# Altium PCB Pcb.PcbDoc (part 2 of 2)
Units mm, origin at the board's own origin, x right, y up, seen from the top; angles counter-clockwise.
Board outline 99.85 x 75.77 mm, 2 copper layers (Top Layer, Bottom Layer); 30 components, 145 nets, 485 pads, 129 vias.
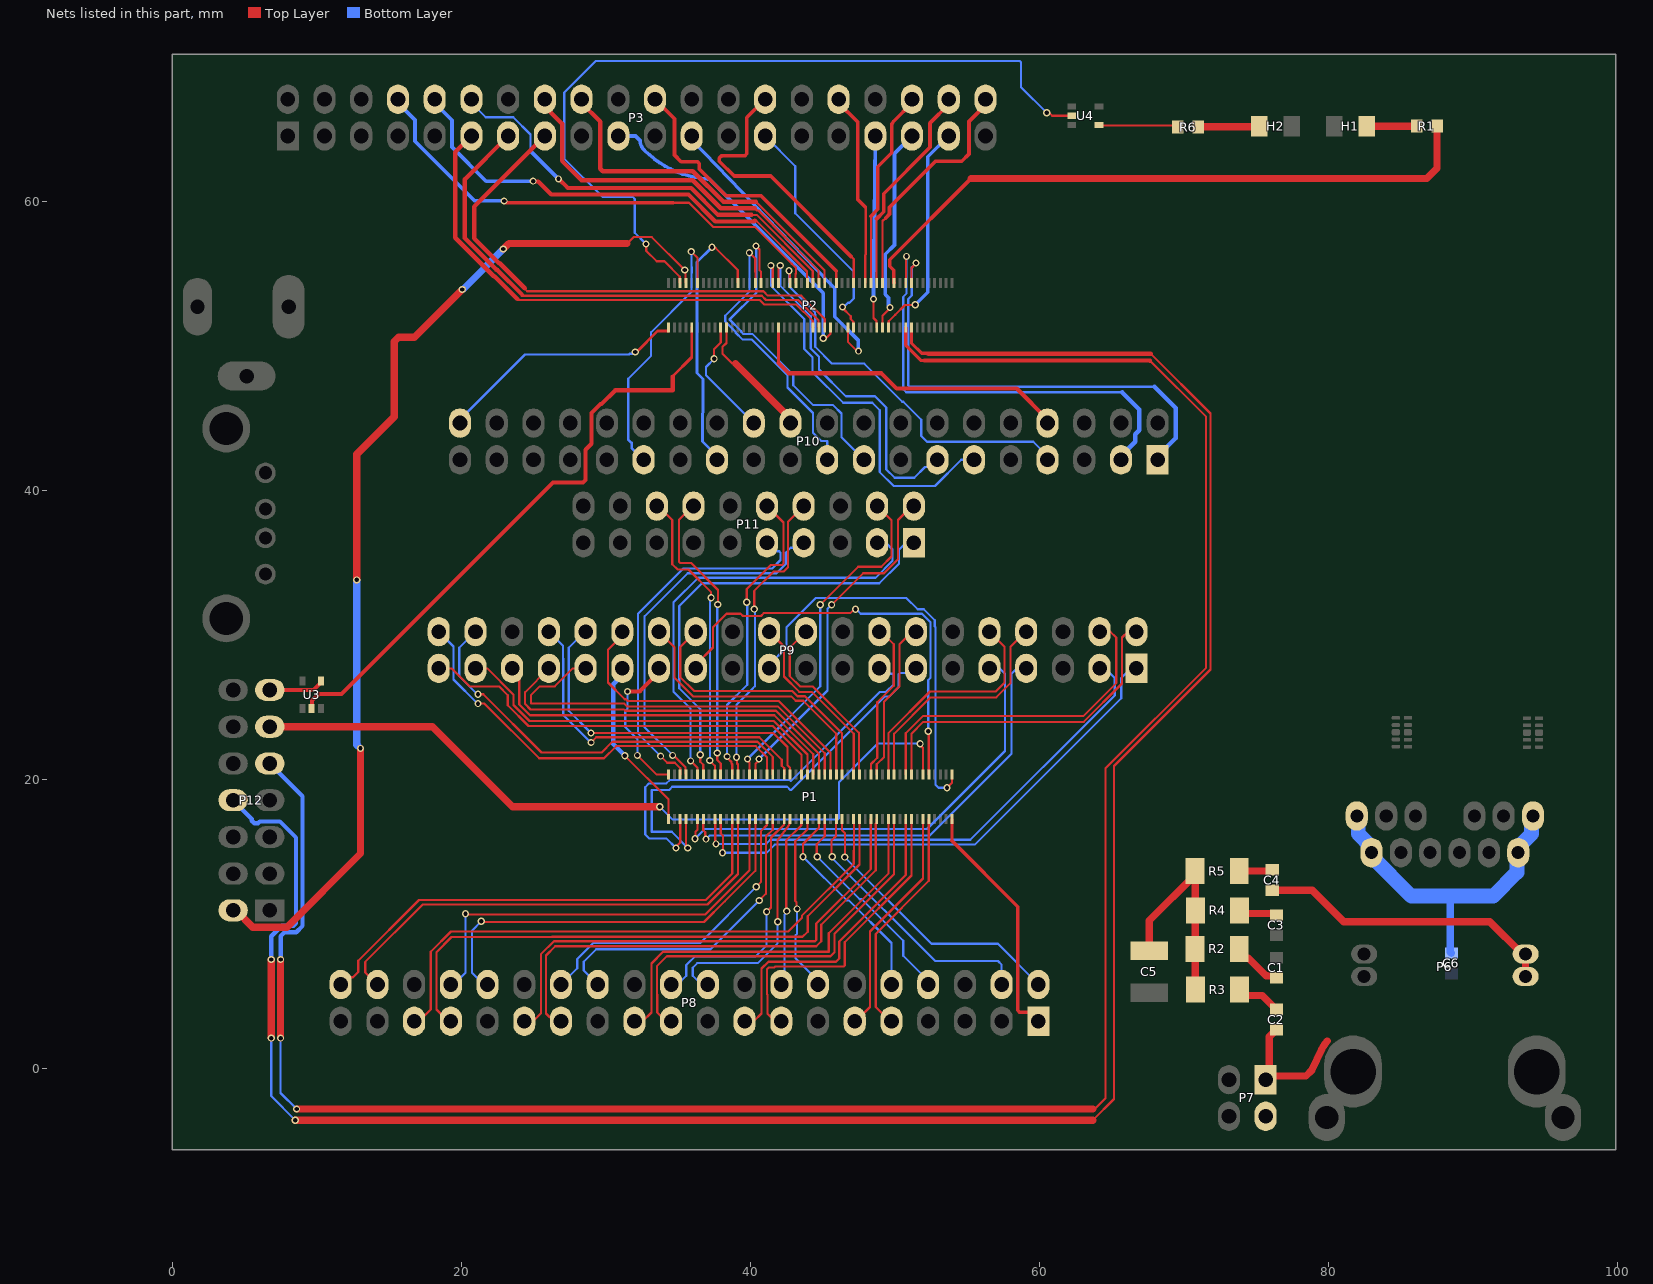
[diagram p2: the nets of this part, all layers, seen from the top]

## Via types
v1: diameter 0.5, hole 0.3, Top Layer to Bottom Layer, 129 vias

## Nets (pads, with @x,y where several pads share a name; then routed paths per layer and width w, separated by ;. In a path a pad name is that pad's centre, name@x,y a point inside that pad or via, vN(x,y) a via of type N, cw(c..) or ccw(c..) an arc to the next point about the centre after c; other vN are vias at no path point) (continued)
GPIO10: P2.44 P3.19 | length 22.8
  Top Layer w0.152: v1(45.034,50.545) 45.1,50.611 45.299,50.611 45.543,50.855 P2.44@45.543,51.297
  Bottom Layer w0.25: P3.19@30.861,64.541 32.055,64.541 32.363,64.233 ccw(c33.401,64.287) 32.666,63.553 ccw(c37.508,68.394) 37.054,61.562 37.148,61.557 44.58,54.124 45.034,53.671 v1(45.034,50.545)
GPIO11: P2.38 P3.23 | length 21.5
  Top Layer w0.152: P2.38@46.743,51.297 46.743,50.302 47.388,49.657 v1(47.473,49.657)
  Bottom Layer w0.25: P3.23@35.941,64.541 35.941,64.287 45.456,54.386 45.459,54.382 45.838,54.004 45.838,52.044 47.45,50.432 47.45,49.68 v1(47.473,49.657)
GPIO12: P2.31 P3.32 | length 13.5
  Top Layer w0.152: P2.31@47.943,54.377 47.943,56.309 47.976,56.342 47.976,59.594 47.943,59.627
  Top Layer w0.25: P3.32@46.101,67.081 46.101,66.827 47.422,65.507 47.422,60.148 47.943,59.627
GPIO13: P2.28 P3.33 | length 13.3
  Top Layer w0.152: v1(48.514,53.264) 48.514,51.946 48.719,51.741 48.719,51.68 48.719,51.321 P2.28@48.743,51.297
  Bottom Layer w0.25: v1(48.514,53.264) 48.641,64.287 P3.33@48.641,64.541
GPIO14: P2.55 P3.8 | length 34.4
  Top Layer w0.152: 34.655,59.919 35.751,59.919 37.419,58.251 40.301,58.251 42.854,55.698 42.87,55.698 43.15,55.418 43.15,55.022 43.119,54.991 43.119,54.401 P2.55@43.143,54.377
  Top Layer w0.25: v1(22.962,60.046) 23.089,59.919 34.655,59.919
  Bottom Layer w0.25: P3.8@15.621,67.081 15.621,66.827 16.798,65.651 16.798,64.181 20.933,60.046 v1(22.962,60.046)
GPIO15: P2.51 P3.10 | length 32.8
  Top Layer w0.152: 40.306,58.674 40.411,58.674 43.919,55.166 43.919,54.401 P2.51@43.943,54.377
  Top Layer w0.3: v1(24.968,61.417) 25,61.385 25.326,61.385 26.226,60.486 35.718,60.486 37.575,58.629 40.261,58.629 40.306,58.674
  Bottom Layer w0.25: P3.10@18.161,67.081 18.161,66.827 19.357,65.631 19.357,63.777 21.717,61.417 v1(24.968,61.417)
GPIO16: P2.29 P3.36 | length 13.9
  Top Layer w0.152: P2.29@48.343,54.377 48.343,58.993
  Top Layer w0.25: 48.343,58.993 48.819,59.469 48.819,62.408 49.784,63.373 49.784,65.369 49.911,65.557 51.181,66.827 P3.36@51.181,67.081
GPIO17: P2.50 P3.11 | length 35.1
  Top Layer w0.152: 23.871,53.259 23.945,53.185 31.753,53.185 40.658,53.185 40.957,52.887 43.182,52.887 44.319,51.75 44.319,51.321 P2.50@44.343,51.297
  Top Layer w0.3: P3.11@20.701,64.541 19.583,63.423 19.583,57.496 22.242,54.837 22.292,54.837 23.871,53.259
GPIO18: P2.49 P3.12 | length 30.2
  Top Layer w0.152: 40.074,59.08 40.435,59.08 44.319,55.196 44.319,54.401 P2.49@44.343,54.377
  Top Layer w0.3: v1(26.721,61.57) 26.743,61.57 27.375,60.938 35.905,60.938 37.762,59.081 40.073,59.081
  Bottom Layer w0.152: P3.12@20.701,66.827 21.691,65.837 23.599,65.837 24.791,64.645 24.791,63.499
  Bottom Layer w0.25: P3.12@20.701,66.827 P3.12@20.701,67.081 ; 24.791,63.499 v1(26.721,61.57)
GPIO19: P2.26 P3.35 | length 14.4
  Top Layer w0.152: P2.26@49.143,51.297 49.143,52.102 49.657,52.616 v1(49.657,52.68)
  Bottom Layer w0.25: v1(49.657,52.68) 49.552,52.785 49.552,53.355 49.327,53.58 49.327,56.363 49.964,57 49.964,63.325 P3.35@51.181,64.541
GPIO20: P2.27 P3.38 | length 14.8
  Top Layer w0.152: P2.27@48.719,54.401 48.719,58.801
  Top Layer w0.25: 48.719,58.801 49.221,59.303 49.221,60.549 52.426,63.754 52.426,65.43 53.721,66.726 P3.38@53.721,67.081
GPIO21: P2.25 P3.40 | length 16.7
  Top Layer w0.152: P2.25@49.143,54.377 49.143,58.656 49.353,58.867
  Top Layer w0.25: 49.353,58.867 49.623,59.136 49.623,59.605 52.786,62.768 52.806,62.788 54.62,62.788 55.118,63.286 55.118,65.542 56.261,66.685 P3.40@56.261,67.081
GPIO22: P2.46 P3.15 | length 36.3
  Top Layer w0.152: 24.396,54.012 24.396,53.962 24.559,53.799 40.905,53.799 41.209,53.495 43.523,53.495 45.143,51.875 P2.46@45.143,51.297
  Top Layer w0.3: 24.396,54.012 22.667,55.741 22.616,55.741 20.887,57.471 20.887,59.647 P3.15@25.781,64.541
GPIO23: P2.47 P3.16 | length 26.5
  Top Layer w0.152: 40.308,59.533 40.457,59.384 40.561,59.384 44.719,55.226 44.719,54.401 P2.47@44.743,54.377
  Top Layer w0.3: P3.16@25.781,67.081 25.781,66.573 26.975,65.38 26.975,62.814 28.319,61.47 36.012,61.47 37.95,59.533 40.308,59.533
GPIO24: P2.45 P3.18 | length 24.6
  Top Layer w0.152: 40.391,59.985 45.126,55.249 45.126,54.394 P2.45@45.143,54.377
  Top Layer w0.3: P3.18@28.321,67.081 28.321,66.827 29.616,65.532 29.616,62.279 29.792,62.103 36.018,62.103 38.137,59.985 40.391,59.985
GPIO25: P2.41 P3.22 | length 20
  Top Layer w0.152: P2.41@45.943,54.377 45.943,55.2
  Top Layer w0.25: P3.22@33.401,67.081 34.674,65.808 34.747,65.735 34.747,63.221 35.204,62.763 36.316,62.763 36.327,62.752 ccw(c38.171,66.517) 36.364,62.734 36.467,62.631 36.467,62.258 38.314,60.412 40.731,60.412 45.943,55.2
GPIO26: P2.24 P3.37 | length 15.4
  Top Layer w0.152: P2.24@49.543,51.297 49.567,51.321 49.567,51.723 50.023,52.179 50.697,52.853 51.405,52.853 v1(51.41,52.857)
  Bottom Layer w0.25: v1(51.41,52.857) 52.273,53.721 52.273,63.094 P3.37@53.721,64.541
GPIO27: P2.48 P3.13 | length 35.6
  Top Layer w0.152: 24.205,53.563 24.279,53.489 40.784,53.489 41.083,53.191 43.308,53.191 44.719,51.78 44.719,51.321 P2.48@44.743,51.297
  Top Layer w0.3: P3.13@23.241,64.541 20.235,61.535 20.235,57.484 22.429,55.289 22.48,55.289 24.205,53.564
ID_SC: P2.35 P3.28 | length 20.3
  Top Layer w0.152: 46.961,56.205 47.143,56.023 P2.35@47.143,54.377
  Top Layer w0.25: P3.28@41.021,67.081 39.751,65.811 39.751,63.305 39.605,63.158 38,63.158 37.854,63.012 37.854,62.789 38.875,61.768 41.399,61.768 46.961,56.205
ID_SD: P2.36 P3.27 | length 16.5
  Top Layer w0.152: v1(46.365,52.705) 46.365,52.635 46.937,52.063 46.937,51.875 47.119,51.693 47.119,51.321 P2.36@47.143,51.297
  Bottom Layer w0.152: P3.27@41.021,64.541 43.109,62.453 43.109,59.189 47.153,55.145 47.153,53.3 46.853,53 46.746,53 46.451,52.705 v1(46.365,52.705)
NetC1_2: C1.2 R2.2 | length 3.5
  Top Layer w0.5: R2.2@73.812,8.306 73.812,8.056 74.212,7.656 74.462,7.656 75.672,6.446 76.228,6.446 C1.2@76.378,6.296
NetC2_2: C2.2 R3.2 | length 3.1
  Top Layer w0.5: R3.2@73.838,5.486 73.838,5.48 74.238,5.08 75.413,5.08 C2.2@76.378,4.115
NetC3_2: C3.2 R4.2 | length 2.6
  Top Layer w0.5: R4.2@73.838,10.973 74.063,10.747 C3.2@76.378,10.747
NetC4_2: C4.2 R5.2 | length 2.3
  Top Layer w0.5: R5.2@73.812,13.691 76.022,13.691 C4.2@76.098,13.767
NetC5_1: C5.1 R2.1 R3.1 R4.1 R5.1 | length 15
  Top Layer w0.5: C5.1@67.589,8.179 67.589,10.266 70.764,13.441 R5.1@70.764,13.691 70.777,13.678 70.777,5.499 R3.1@70.79,5.486
NetC6_2: C6.2 P6.1 P6.6 P6.7 P6.12 | length 23.4
  Bottom Layer w0.5: 88.417,11.963 88.417,8.077 C6.2@88.494,8.001
  Bottom Layer w1.016: P6.12@81.944,17.5 82.042,17.403 82.042,16.274 82.964,15.352 P6.6@82.964,14.96 82.964,14.725 85.726,11.963 88.417,11.963 91.389,11.963 93.023,13.597 93.023,14.869 P6.1@93.114,14.96 93.114,15.352 94.037,16.274 94.037,17.403 P6.7@94.134,17.5
NetH1_2: H1.2 R1.2 | length 3.5
  Top Layer w0.5: H1.2@82.623,65.202 82.635,65.215 86.09,65.215 R1.2@86.103,65.227
NetH2_2: H2.2 R6.2 | length 4.3
  Top Layer w0.5: R6.2@70.971,65.151 70.996,65.176 75.187,65.176 H2.2@75.213,65.202
NetP2_21: P2.21 R1.1 | length 45.1
  Top Layer w0.25: P2.21@49.943,54.377 49.92,54.4 49.92,55.244 49.637,55.527 49.637,55.979 55.253,61.595
  Top Layer w0.5: 55.253,61.595 86.792,61.595 87.503,62.306 R1.1@87.503,65.227
NetP12_13: P12.13 U3.4 | length 3.9
  Top Layer w0.3: P12.13@6.756,26.213 9.772,26.213 10.302,26.743 U3.4@10.302,26.833
NetR6_1: R6.1 U4.4 | length 5.5
  Top Layer w0.152: U4.4@64.12,65.263 R6.1@69.571,65.263
nEXTRST: P2.100 P10.40 | length 17.5
  Top Layer w0.197: v1(32.029,49.596) 32.134,49.596 33.583,51.045 34.341,51.045 34.343,51.047 P2.100@34.343,51.297
  Bottom Layer w0.152: P10.40@19.914,44.679 19.914,44.933 24.409,49.428 31.616,49.428 31.66,49.472 31.905,49.472 v1(32.029,49.596)
nPWR_LED: P2.95 U4.2 | length 56.7
  Top Layer w0.152: v1(32.774,57.065) 32.795,57.045 32.795,56.587 33.515,55.868 34.054,55.868 35.119,54.803 35.119,54.401 P2.95@35.143,54.377 ; v1(60.503,66.142) 60.678,66.142 60.881,65.938 U4.2@62.22,65.938
  Bottom Layer w0.152: v1(32.774,57.065) 32.004,57.836 32.004,60.182 31.861,60.325 29.769,60.325 27.127,62.967 27.127,67.542 29.309,69.723 58.636,69.723 58.725,69.634 58.725,67.92 v1(60.503,66.142) v1@60.376,66.142
nRPIBOOT: P2.93 P12.2 | length 73
  Top Layer w0.152: 31.471,57.099 31.915,57.543 33.185,57.543 v1(35.458,55.27) 35.519,55.21 35.519,54.401 P2.93@35.543,54.377
  Top Layer w0.5: P12.2@4.216,10.973 4.41,10.973 5.574,9.809 7.939,9.809 13.03,14.9 v1(13.03,22.174) ; v1(12.776,33.833) 12.776,42.52 15.367,45.11 15.367,50.329 15.66,50.622 16.764,50.622 v1(20.066,53.924) ; v1(22.911,56.718) 23.292,57.099 31.471,57.099
  Bottom Layer w0.5: v1(12.776,33.833) 12.776,22.428 v1(13.03,22.174) ; v1(20.066,53.924) 20.117,53.924 v1(22.911,56.718)
Pin15: P2.15 P10.1 | length 33.4
  Top Layer w0.152: P2.15@51.143,54.377 51.143,55.412 51.46,55.729 v1(51.46,55.753)
  Bottom Layer w0.152: v1(51.46,55.753) 51.16,55.453 51.16,53.506 50.92,53.265 50.92,47.276 51.009,47.187 67.952,47.187 ; P10.1@68.174,42.139 P10.1@68.174,42.393
  Bottom Layer w0.3: 67.952,47.187 69.418,45.72 69.418,43.637 P10.1@68.174,42.393
Pin17: P2.17 P10.3 | length 32.1
  Top Layer w0.152: P2.17@50.743,54.377 50.767,54.401 50.767,56.177 v1(50.8,56.21)
  Bottom Layer w0.152: v1(50.8,56.21) 50.808,56.202 50.808,53.651 50.568,53.411 50.568,47.022 50.781,46.809 65.713,46.809 ; P10.3@65.634,42.139 P10.3@65.634,42.393
  Bottom Layer w0.3: P10.3@65.634,42.393 66.624,43.383 66.624,43.91 66.904,44.19 66.904,45.618 65.713,46.809
Pin101: P1.101 P9.21 | length 28.4
  Top Layer w0.152: v1(53.594,19.456) 53.943,19.805 P1.101@53.943,20.377
  Bottom Layer w0.152: P9.21@41.3,27.711 41.3,27.965 42.497,29.162 42.497,30.562 44.519,32.584 50.782,32.584 51.566,31.799 51.996,31.799 52.754,31.041 52.754,30.611 52.807,30.559 52.807,19.66 53.01,19.456 v1(53.594,19.456)
Pin102: P1.102 P8.1 | length 16.9
  Top Layer w0.2: 53.943,15.78 P1.102@53.943,17.297
  Top Layer w0.25: 53.943,15.78 58.496,11.227 58.496,4.058 58.643,3.912 59.309,3.912 P8.1@59.919,3.302
Pin109: P1.109 P9.25 | length 30
  Top Layer w0.152: P9.25@36.22,27.711 36.22,27.965 37.417,29.162 37.417,30.562 38.35,31.495 39.325,31.495 39.488,31.332 40.727,31.332 40.928,31.533 46.907,31.533 47.175,31.801 v1(47.269,31.801) ; v1(52.299,23.368) 52.343,23.324 P1.109@52.343,20.377
  Bottom Layer w0.152: v1(47.269,31.801) 47.335,31.801 47.64,31.495 51.87,31.495 52.45,30.915 52.45,27.047 52.299,26.896 v1(52.299,23.368)
Pin110: P1.110 P8.9 | length 16
  Top Layer w0.152: P8.9@49.759,3.302 49.657,3.302 48.666,4.293 48.666,9.34 52.343,13.017 P1.110@52.343,17.297
Pin112: P1.112 P8.11 | length 16
  Top Layer w0.152: P8.11@47.219,3.302 47.276,3.302 48.266,4.293 48.266,9.506 51.943,13.183 P1.112@51.943,17.297
Pin115: P1.115 P9.2 | length 23.2
  Top Layer w0.152: P1.115@51.143,20.377 51.143,23.19 51.962,24.009 63.054,24.009 65.703,26.659 65.703,29.845 66.11,30.251 P9.2@66.7,30.251
Pin116: P1.116 P8.15 | length 21.8
  Top Layer w0.152: P8.15@42.139,3.302 41.707,3.302 41.173,3.835 41.173,5.153 41.149,5.178 41.149,6.89 41.275,7.017 41.659,7.017 41.729,7.086 46.443,7.086 46.532,7.175 46.532,8.77 51.143,13.381 P1.116@51.143,17.297
Pin117: P1.117 P9.4 | length 23.3
  Top Layer w0.152: P1.117@50.743,20.377 50.743,23.22 51.932,24.409 63.024,24.409 65.303,26.689 65.303,29.845 64.897,30.251 P9.4@64.16,30.251
Pin118: P1.118 P8.17 | length 21.7
  Top Layer w0.152: P8.17@39.599,3.302 40.24,3.302 40.773,3.835 40.773,6.945 41.245,7.417 45.923,7.417 46.152,7.645 46.152,8.82 50.743,13.411 P1.118@50.743,17.297
Pin121: P1.121 P9.8 | length 16.3
  Top Layer w0.152: P1.121@49.943,20.377 49.943,23.19 52.458,25.705 57.002,25.705 57.982,26.684 57.982,29.185 59.049,30.251 P9.8@59.08,30.251
Pin122: P1.122 P8.21 | length 28
  Top Layer w0.152: P8.21@34.519,3.302 34.163,3.302 33.553,3.912 33.553,5.153 33.529,5.178 33.529,7.106 34.221,7.799 45.541,7.799 45.815,8.073 45.815,9.355 49.943,13.483 P1.122@49.943,17.297
Pin123: P1.123 P9.10 | length 16.3
  Top Layer w0.152: P1.123@49.543,20.377 49.543,23.22 52.428,26.105 56.972,26.105 57.582,26.714 57.582,29.21 P9.10@56.54,30.251
Pin124: P1.124 P8.23 | length 28.3
  Top Layer w0.152: P8.23@31.979,3.302 32.544,3.302 33.153,3.912 33.153,7.296 33.96,8.103 45.415,8.103 45.415,9.385 49.543,13.513 P1.124@49.543,17.297
Pin127: P1.127 P9.14 | length 11.2
  Top Layer w0.152: P1.127@48.743,20.377 48.743,21.073 49.239,21.569 49.239,25.409 50.311,26.481 50.311,29.388 51.175,30.251 P9.14@51.46,30.251
Pin128: P1.128 P8.27 | length 34.8
  Top Layer w0.152: P8.27@26.899,3.302 26.391,3.302 25.857,3.835 25.857,7.852 26.492,8.487 44.553,8.487 44.904,8.837 44.904,9.979 48.671,13.746 48.671,16.975 48.743,17.047 P1.128@48.743,17.297
Pin129: P1.129 P9.16 | length 11
  Top Layer w0.152: P1.129@48.343,20.377 48.343,21.103 48.768,21.528 48.768,25.368 49.911,26.511 49.911,29.388 49.047,30.251 P9.16@48.92,30.251
Pin130: P1.130 P8.29 | length 34.9
  Top Layer w0.152: P8.29@24.359,3.302 24.972,3.302 25.505,3.835 25.505,7.93 26.414,8.839 44.475,8.839 44.552,8.915 44.552,10.057 48.319,13.824 48.319,17.273 P1.130@48.343,17.297
Pin133: P1.133 P9.20 | length 12.8
  Top Layer w0.152: P9.20@43.84,30.251 42.723,29.134 42.723,27.175 43.43,26.467 44.296,26.467 47.503,23.261 47.503,20.74 47.519,20.723 47.519,20.401 P1.133@47.543,20.377
Pin134: P1.134 P8.33 | length 40.8
  Top Layer w0.152: P8.33@19.279,3.302 19.101,3.302 18.288,4.115 18.288,8.084 19.329,9.125 26.27,9.125 26.288,9.143 43.609,9.143 43.961,9.495 43.961,10.561 47.543,14.143 P1.134@47.543,17.297
Pin135: P1.135 P9.22 | length 12.8
  Top Layer w0.152: P9.22@41.3,30.251 42.323,29.229 42.323,27.145 43.382,26.086 44.247,26.086 47.143,23.19 P1.135@47.143,20.377
Pin136: P1.136 P8.35 | length 40.5
  Top Layer w0.152: P8.35@16.739,3.302 17.075,3.302 17.888,4.115 17.888,8.114 19.283,9.509 42.621,9.509 43.561,10.449 43.561,10.591 47.098,14.129 47.143,14.173 47.175,16.117 ccw(c46.547,16.129) 47.175,16.135 47.167,17.023 P1.136@47.143,17.297
Pin139: P1.139 P9.26 | length 19.2
  Top Layer w0.152: P9.26@36.22,30.251 35.154,29.185 35.154,27.095 36.093,26.156 42.882,26.156 43.256,25.782 43.781,25.782 46.343,23.22 P1.139@46.343,20.377
Pin140: P1.140 P8.2 | length 19.8
  Top Layer w0.152: P1.140@46.343,17.297 46.343,16.508 46.547,16.304 46.547,14.67 v1(46.533,14.656)
  Bottom Layer w0.152: v1(46.533,14.656) 52.527,8.661 57.125,8.661 59.919,5.867 P8.2@59.919,5.842
Pin141: P1.141 P9.28 | length 19.2
  Top Layer w0.152: P9.28@33.68,30.251 34.754,29.178 34.754,27.065 36.063,25.756 42.852,25.756 43.13,25.478 43.655,25.478 45.943,23.19 P1.141@45.943,20.377
Pin142: P1.142 P8.4 | length 19
  Top Layer w0.152: v1(45.662,14.674) 45.618,14.718 45.618,15.815 45.919,16.116 45.919,16.129 45.919,17.023 P1.142@45.943,17.297
  Bottom Layer w0.152: v1(45.662,14.674) 45.662,14.587 52.781,7.468 57.125,7.468 57.379,7.214 P8.4@57.379,5.842
Pin143: P1.143 P9.30 | length 22.8
  Top Layer w0.152: P9.30@31.14,30.251 31.14,29.997 30.15,29.007 30.15,26.73 31.304,25.577 31.395,25.577 31.521,25.452 41.96,25.452 45.543,21.869 P1.143@45.543,20.377
Pin145: P1.145 P9.31 | length 28.3
  Top Layer w0.152: P9.31@28.6,27.711 27.714,27.711 26.47,26.467 25.426,26.467 24.816,25.857 24.816,25.273 31.269,25.273 31.461,25.081 41.901,25.081 45.143,21.839 P1.145@45.143,20.377
Pin146: P1.146 P8.8 | length 15
  Top Layer w0.152: v1(44.628,14.681) 44.586,14.723 44.586,15.547 45.143,16.104 P1.146@45.143,17.297
  Bottom Layer w0.152: v1(44.628,14.681) 47.563,11.746 47.702,11.746 50.571,8.877 50.571,7.823 52.299,6.096 P8.8@52.299,5.842
Pin147: P1.147 P9.33 | length 26.3
  Top Layer w0.152: P9.33@26.06,27.711 24.416,26.067 24.416,25.243 24.786,24.873 31.24,24.873 31.336,24.777 41.775,24.777 44.743,21.809 P1.147@44.743,20.377
Pin148: P1.148 P8.10 | length 14.5
  Top Layer w0.152: v1(43.637,14.681) 43.634,14.684 43.634,15.567 44.743,16.676 P1.148@44.743,17.297
  Bottom Layer w0.152: v1(43.637,14.681) 46.655,11.663 46.807,11.663 49.759,8.712 P8.10@49.759,5.842
Pin149: P1.149 P9.35 | length 25.9
  Top Layer w0.152: P9.35@23.52,27.711 24.016,27.216 24.016,25.213 24.756,24.473 41.649,24.473 44.343,21.779 P1.149@44.343,20.377
Pin151: P1.151 P9.37 | length 27.2
  Top Layer w0.152: P9.37@20.98,27.711 21.792,27.711 23.616,25.887 23.616,25.183 24.726,24.073 41.619,24.073 43.943,21.749 P1.151@43.943,20.377
Pin152: P1.152 P8.14 | length 12.5
  Top Layer w0.152: v1(43.231,11.074) 43.18,11.125 43.18,11.552 43.104,11.628 43.104,15.748 43.943,16.587 P1.152@43.943,17.297
  Bottom Layer w0.152: v1(43.231,11.074) 43.231,9.364 43.129,9.262 43.129,7.645 44.679,6.096 P8.14@44.679,5.842
Pin153: P1.153 P9.39 | length 29.3
  Top Layer w0.152: P9.39@18.44,27.711 19.326,27.711 20.57,26.467 22.606,26.467 23.216,25.857 23.216,25.153 24.646,23.723 41.539,23.723 43.543,21.719 P1.153@43.543,20.377
Pin154: P1.154 P8.16 | length 12.1
  Top Layer w0.152: v1(42.511,10.919) 42.486,10.944 42.486,15.814 43.519,16.847 43.519,17.273 P1.154@43.543,17.297
  Bottom Layer w0.152: P8.16@42.139,5.842 42.363,6.066 42.363,10.677 42.511,10.825 v1(42.511,10.919)
Pin157: P1.157 P9.32 | length 24.1
  Top Layer w0.152: v1(28.971,23.245) 41.587,23.245 42.564,22.268 42.564,21.012 42.743,20.833 P1.157@42.743,20.377
  Bottom Layer w0.152: P9.32@28.6,30.251 28.55,30.251 27.432,29.134 27.432,24.783 v1(28.971,23.245)
Pin158: P1.158 P8.20 | length 17.3
  Top Layer w0.152: v1(41.885,10.185) 41.885,15.77 41.885,15.821 41.916,15.862 42.671,16.852 42.719,17.023 P1.158@42.743,17.297
  Bottom Layer w0.152: P8.20@37.059,5.842 36.627,5.842 36.017,6.452 36.017,7.01 36.327,7.32 40.518,7.32 41.885,8.687 v1(41.885,10.185)
Pin159: P1.159 P9.34 | length 24
  Top Layer w0.152: v1(28.981,22.581) 28.983,22.581 29.343,22.941 40.622,22.941 42.164,21.399 42.164,20.982 42.343,20.803 P1.159@42.343,20.377
  Bottom Layer w0.152: P9.34@26.06,30.251 27.032,29.28 27.032,28.394 27.05,28.375 27.05,24.488 28.957,22.581 v1(28.981,22.581)
Pin160: P1.160 P8.22 | length 17.4
  Top Layer w0.152: v1(41.123,10.871) 41.427,11.176 41.427,16.009 42.319,16.9 42.319,17.273 P1.160@42.343,17.297
  Bottom Layer w0.152: P8.22@34.519,5.842 34.956,5.842 35.565,6.452 35.565,7.198 35.698,7.33 36.14,7.772 40.331,7.772 41.123,8.564 v1(41.123,10.871)
Pin163: P1.163 P9.38 | length 29.4
  Top Layer w0.152: v1(21.158,25.925) 21.522,25.925 25.552,21.895 29.711,21.895 30.453,22.637 40.496,22.637 41.543,21.59 P1.163@41.543,20.377
  Bottom Layer w0.152: P9.38@20.98,30.251 19.863,29.134 19.863,27.175 21.113,25.925 v1(21.158,25.925)
Pin164: P1.164 P8.26 | length 21.9
  Top Layer w0.152: v1(40.615,11.659) 41.072,12.116 41.072,16.083 41.543,16.554 P1.164@41.543,17.297
  Bottom Layer w0.152: P8.26@29.439,5.842 28.473,6.807 28.473,7.417 29.337,8.28 37.236,8.28 v1(40.615,11.659)
Pin165: P1.165 P9.40 | length 29.5
  Top Layer w0.152: v1(21.158,25.273) 21.609,25.273 25.387,21.495 29.877,21.495 30.715,22.333 40.37,22.333 41.143,21.56 P1.165@41.143,20.377
  Bottom Layer w0.152: P9.40@18.44,30.251 19.463,29.229 19.463,26.944 21.134,25.273 v1(21.158,25.273)
Pin166: P1.166 P8.28 | length 21.7
  Top Layer w0.152: v1(40.411,12.598) 40.411,12.614 40.742,12.944 40.742,16.469 41.143,16.871 P1.166@41.143,17.297
  Bottom Layer w0.152: P8.28@26.899,5.842 28.021,6.965 28.021,7.604 29.15,8.732 36.545,8.732 v1(40.411,12.598)
Pin169: P1.169 P11.2 | length 24
  Top Layer w0.152: P1.169@40.343,20.377 40.343,21.097 40.589,21.343 v1(40.589,21.438) ; v1(45.618,32.106) 47.802,34.29 49.235,34.29 50.21,35.265 50.21,37.972 51.176,38.938 P11.2@51.308,38.938
  Bottom Layer w0.152: v1(40.589,21.438) 45.339,26.187 45.339,31.827 v1(45.618,32.106)
Pin170: P1.170 P8.32 | length 29.3
  Top Layer w0.152: v1(21.387,10.211) 21.438,10.16 36.786,10.16 38.221,11.595 40.343,13.717 P1.170@40.343,17.297
  Bottom Layer w0.152: v1(21.387,10.211) 20.747,9.571 20.747,6.655 21.559,5.842 P8.32@21.819,5.842
Pin171: P1.171 P11.4 | length 24.1
  Top Layer w0.152: v1(39.802,21.438) 39.802,21.343 39.943,21.202 P1.171@39.943,20.377 ; v1(44.83,32.106) 47.467,34.742 49.047,34.742 49.758,35.453 49.758,37.948 P11.4@48.768,38.938
  Bottom Layer w0.152: v1(39.802,21.438) 44.83,26.466 v1(44.83,32.106)
Pin172: P1.172 P8.34 | length 29.9
  Top Layer w0.152: v1(20.295,10.744) 20.345,10.693 36.89,10.693 39.943,13.747 P1.172@39.943,17.297
  Bottom Layer w0.152: P8.34@19.279,5.842 19.482,5.842 20.295,6.655 v1(20.295,10.744)
Pin175: P1.175 P11.8 | length 21
  Top Layer w0.152: v1(39.04,21.565) 39.067,21.537 39.067,21.131 39.143,21.055 P1.175@39.143,20.377 ; v1(40.265,31.81) 40.265,33.073 41.609,34.417 42.3,34.417 42.595,34.712 42.595,37.845 P11.8@43.688,38.938
  Bottom Layer w0.152: v1(39.04,21.565) 39.04,25.197 40.107,26.264 40.31,26.467 40.31,31.764 v1(40.265,31.81)
Pin176: P1.176 P8.38 | length 34
  Top Layer w0.152: P8.38@14.199,5.842 13.36,6.68 13.36,7.41 17.33,11.38 37.034,11.38 39.143,13.489 P1.176@39.143,17.297
Pin177: P1.177 P11.10 | length 21.3
  Top Layer w0.152: v1(38.39,21.62) 38.39,21.534 38.686,21.239 38.686,21.131 38.743,21.074 P1.177@38.743,20.377 ; v1(39.751,32.283) 39.751,33.198 41.422,34.869 42.202,34.869 42.291,34.958 42.291,37.795 P11.10@41.148,38.938
  Bottom Layer w0.152: v1(38.39,21.62) 38.379,21.63 38.379,25.176 39.787,26.583 39.787,32.247 v1(39.751,32.283)
Pin178: P1.178 P8.40 | length 34.5
  Top Layer w0.152: P8.40@11.659,5.842 12.156,6.339 12.511,6.339 12.878,6.706 12.878,7.493 17.069,11.684 36.908,11.684 38.743,13.519 P1.178@38.743,17.297
Pin181: P1.181 P11.14 | length 20.7
  Top Layer w0.152: P11.14@36.068,38.938 36.017,38.938 35.052,37.973 35.052,35.098 35.154,34.996 35.9,34.996 37.761,33.134 37.761,32.148 v1(37.744,32.131) ; v1(37.705,21.855) 37.705,21.366 37.943,21.128 P1.181@37.943,20.377
  Bottom Layer w0.152: v1(37.705,21.855) 37.705,32.091 v1(37.744,32.131)
Pin182: P1.182 P9.1 | length 37.1
  Top Layer w0.152: P1.182@37.943,17.297 37.943,16.286 38.095,16.133 38.095,14.981 v1(38.075,14.961)
  Bottom Layer w0.152: v1(38.075,14.961) 41.123,14.961 41.681,15.519 55.524,15.519 65.654,25.649 65.654,27.051 66.314,27.711 P9.1@66.7,27.711
Pin183: P1.183 P11.16 | length 20.8
  Top Layer w0.152: P11.16@33.528,38.938 33.635,38.938 34.6,37.973 34.6,34.91 34.966,34.544 35.712,34.544 37.283,32.973 v1(37.283,32.592) ; v1(37.186,21.336) 37.543,20.979 P1.183@37.543,20.377
  Bottom Layer w0.152: v1(37.186,21.336) 37.21,21.361 37.21,32.519 v1(37.283,32.592)
Pin184: P1.184 P9.3 | length 36.1
  Top Layer w0.152: P1.184@37.543,17.297 37.567,17.273 37.567,15.621 v1(37.617,15.57)
  Bottom Layer w0.152: v1(37.617,15.57) 41.093,15.57 41.373,15.85 55.216,15.85 65.202,25.836 65.202,27.051 64.541,27.711 P9.3@64.16,27.711
Pin187: P1.187 P11.1 | length 31
  Top Layer w0.152: v1(36.525,21.742) 36.525,21.258 36.743,21.041 P1.187@36.743,20.377
  Bottom Layer w0.152: v1(36.525,21.742) 36.525,24.892 35.077,26.34 35.077,32.029 36.652,33.604 48.92,33.604 50.287,34.971 50.287,35.941 50.744,36.398 P11.1@51.308,36.398
Pin188: P1.188 P9.7 | length 31.7
  Top Layer w0.152: P1.188@36.743,17.297 36.743,16.513 36.878,16.378 36.878,15.954 v1(36.932,15.9)
  Bottom Layer w0.152: v1(36.932,15.9) 37.186,16.154 52.404,16.154 58.059,21.809 58.059,27.33 58.44,27.711 P9.7@59.08,27.711
Pin189: P1.189 P11.3 | length 31
  Top Layer w0.152: v1(35.865,21.311) 36.343,20.832 P1.189@36.343,20.377
  Bottom Layer w0.152: v1(35.865,21.311) 35.865,24.913 34.67,26.108 34.67,32.262 36.395,33.986 48.663,33.986 49.835,35.158 49.835,35.941 49.378,36.398 P11.3@48.768,36.398
Pin190: P1.190 P9.9 | length 32
  Top Layer w0.152: v1(36.17,15.926) 36.206,15.962 36.206,16.404 36.343,16.541 P1.190@36.343,17.297
  Bottom Layer w0.152: v1(36.17,15.926) 36.85,16.606 52.217,16.606 57.607,21.996 57.607,27.33 57.226,27.711 P9.9@56.54,27.711
Pin193: P1.193 P11.7 | length 25.7
  Top Layer w0.152: v1(34.62,21.692) 34.684,21.692 35.519,20.857 35.519,20.401 P1.193@35.543,20.377
  Bottom Layer w0.152: v1(34.62,21.692) 32.685,23.627 32.685,31.313 35.662,34.29 41.808,34.29 42.443,34.925 42.443,35.712 42.787,36.056 43.346,36.056 P11.7@43.688,36.398
Pin194: P1.194 P9.13 | length 30.4
  Top Layer w0.152: P1.194@35.543,17.297 35.543,15.417 v1(35.669,15.291)
  Bottom Layer w0.152: v1(35.669,15.291) 34.557,16.403 33.172,16.403 33.172,19.304 34.376,19.304 34.6,19.528 42.54,19.528 42.764,19.304 42.824,19.304 49.276,25.756 49.606,25.756 50.267,26.416 50.267,27.307 50.356,27.396 51.145,27.396 P9.13@51.46,27.711
Pin195: P1.195 P11.9 | length 25.7
  Top Layer w0.152: v1(33.79,21.641) 34.248,21.184 34.762,21.184 35.143,20.803 P1.195@35.143,20.377
  Bottom Layer w0.152: v1(33.79,21.641) 32.233,23.199 32.233,31.5 35.342,34.61 41.489,34.61 42.084,35.205 42.084,35.719 41.995,35.808 41.856,35.808 41.265,36.398 P11.9@41.148,36.398
Pin196: P1.196 P9.15 | length 29.9
  Top Layer w0.152: v1(34.849,15.291) 34.849,15.378 35.143,15.673 P1.196@35.143,17.297
  Bottom Layer w0.152: v1(34.849,15.291) 34.188,15.951 32.985,15.951 32.72,16.216 32.72,19.491 32.985,19.756 34.189,19.756 34.413,19.98 42.727,19.98 42.794,19.913 48.956,26.075 49.367,26.075 49.911,26.619 49.911,27.254 49.821,27.344 49.288,27.344 P9.15@48.92,27.711
Pin199: P1.199 P9.27 | length 10.5
  Top Layer w0.152: v1(32.182,21.692) 33.497,20.377 P1.199@34.343,20.377
  Top Layer w0.3: v1(31.496,26.111) 32.334,26.111 33.68,27.457 P9.27@33.68,27.711
  Bottom Layer w0.152: v1(31.496,26.111) 31.496,24.914 31.344,24.761 31.344,23.658 32.182,22.819 v1(32.182,21.692)
Pin200: P1.200 P9.29 | length 12.3
  Top Layer w0.152: v1(31.318,21.666) 34.343,18.641 P1.200@34.343,17.297
  Bottom Layer w0.3: P9.29@31.14,27.711 31.14,27.254 30.505,26.619 30.505,22.479 v1(31.318,21.666)
RUN_PG: P2.92 U3.2 | length 41.8
  Top Layer w0.2: 34.62,47.904 35.943,49.227 P2.92@35.943,51.297
  Top Layer w0.3: U3.2@9.652,24.933 9.678,24.959 9.678,25.48 10.142,25.944 11.72,25.944 26.34,40.564 28.422,40.564 28.598,40.74 28.598,42.833 29.01,43.245 29.01,45.373 29.633,45.997 29.704,45.997 30.646,46.939 33.865,46.939 33.884,46.958 34.341,46.958 34.359,46.939 34.62,46.939 34.62,47.904
SCL0: P2.80 P10.22 | length 8.8
  Top Layer w0.152: P2.80@38.343,51.297 38.343,50.221 38.075,49.952 38.075,49.479 38.76,48.793 38.964,48.793
  Top Layer w0.5: 38.964,48.793 42.774,44.983 P10.22@42.774,44.679
SD_CLK: P2.57 P10.7 | length 27
  Top Layer w0.152: v1(42.672,55.22) 42.719,55.173 42.719,54.401 P2.57@42.743,54.377
  Bottom Layer w0.152: v1(42.672,55.22) 42.672,54.153 44.475,52.349 44.475,52.195 44.479,52.191 44.479,49.958 45.644,48.793 47.869,48.793 50.509,46.153 50.574,46.153 51.816,44.91 51.816,43.789 52.222,43.383 59.564,43.383 60.554,42.393 P10.7@60.554,42.139
SD_CMD: P2.62 P10.8 | length 22.9
  Top Layer w0.2: 41.943,48.835 P2.62@41.943,51.297
  Top Layer w0.3: 41.943,48.835 42.661,48.117 49.062,48.117 50.113,47.066 58.42,47.066 60.554,44.933 P10.8@60.554,44.679
SD_DAT0: P2.63 P10.11 | length 27.5
  Top Layer w0.152: v1(41.417,55.575) 41.543,55.449 P2.63@41.543,54.377
  Bottom Layer w0.152: v1(41.417,55.575) 41.417,54.184 43.723,51.878 43.723,49.805 44.298,49.231 44.298,48.2 46.417,46.081 48.438,46.081 48.952,45.567 48.952,41.287 49.907,40.331 50.022,40.331 50.028,40.326 52.775,40.326 54.588,42.139 P10.11@55.474,42.139
SD_DAT1: P2.67 P10.17 | length 23.3
  Top Layer w0.152: v1(40.39,56.925) 40.635,56.68 40.635,55.251 40.743,55.143 P2.67@40.743,54.377
  Bottom Layer w0.152: v1(40.39,56.925) 40.407,56.908 40.407,53.684 38.561,51.838 39.37,51.029 39.37,50.978 39.497,50.851 40.137,50.851 42.97,48.017 42.97,47.301 44.349,45.923 45.724,45.923 46.304,45.343 46.304,43.689 P10.17@47.854,42.139
SD_DAT2: P2.69 P10.19 | length 20.8
  Top Layer w0.152: v1(39.929,56.464) 40.331,56.062 40.331,55.125 40.343,55.113 P2.69@40.343,54.377
  Bottom Layer w0.152: v1(39.929,56.464) 39.929,53.772 38.257,52.1 38.257,51.712 38.97,50.999 38.97,50.948 39.467,50.451 40.107,50.451 42.57,47.987 42.57,47.136 44.324,45.382 44.324,44.015 44.904,43.435 45.314,43.435 P10.19@45.314,42.139
SD_DAT3: P2.61 P10.13 | length 23.9
  Top Layer w0.152: P2.61@41.943,54.377 41.943,55.449 v1(42.069,55.575)
  Bottom Layer w0.152: v1(42.069,55.575) 42.069,54.172 44.175,52.065 44.175,49.832 44.75,49.258 44.75,48.387 46.604,46.533 48.625,46.533 49.404,45.754 49.404,41.475 49.984,40.895 51.334,40.895 52.081,41.641 52.436,41.641 P10.13@52.934,42.139
SD_PWR_ON: P2.75 P10.25 | length 19.1
  Top Layer w0.152: v1(37.339,56.846) 37.406,56.78 37.607,56.78 39.119,55.267 39.119,54.401 P2.75@39.143,54.377
  Bottom Layer w0.2: v1(37.339,56.846) 36.304,55.811 36.304,48.144 36.725,47.724 36.725,45.398 36.68,45.353 36.68,43.407 37.694,42.393 P10.25@37.694,42.139
SDA0: P2.82 P10.24 | length 8.4
  Top Layer w0.152: v1(37.49,49.124) 37.49,49.798 37.943,50.251 P2.82@37.943,51.297
  Bottom Layer w0.152: v1(37.49,49.124) 36.93,48.563 36.93,47.982 P10.24@40.234,44.679
SYNC_IN: P2.16 P12.8 | length 158.2
  Top Layer w0.152: 63.691,-3.543 65.151,-2.083 65.151,20.955 71.83,27.634 71.83,45.34 67.689,49.48
  Top Layer w0.22: P2.16@51.143,51.297 51.143,50.203 51.841,49.505 52.273,49.505
  Top Layer w0.3: 52.298,49.48 67.689,49.48
  Top Layer w0.5: v1(6.849,2.134) v1(6.849,7.569) ; v1(8.522,-3.543) 63.691,-3.543
  Bottom Layer w0.152: v1(6.849,2.134) 6.849,-1.87 v1(8.522,-3.543)
  Bottom Layer w0.3: P12.8@4.216,18.593 5.512,17.297 5.512,17.168 5.688,16.992 5.937,16.992 6.062,17.117 7.451,17.117 8.566,16.002 8.566,10.085 8.39,9.909 7.584,9.909 6.849,9.175 v1(6.849,7.569)
SYNC_OUT: P2.18 P12.9 | length 156.7
  Top Layer w0.152: 63.678,-2.769 63.82,-2.769 64.567,-2.022 64.567,20.801 71.526,27.76 71.526,45.118 67.645,48.999 67.636,48.999
  Top Layer w0.22: P2.18@50.743,51.297 50.743,50.07 51.81,49.003 52.04,49.003
  Top Layer w0.3: 52.04,49.003 67.632,49.003 67.636,48.999
  Top Layer w0.5: v1(7.501,2.134) v1(7.501,7.569) ; v1(8.611,-2.769) 63.678,-2.769
  Bottom Layer w0.152: v1(7.501,2.134) 7.501,-1.659 v1(8.611,-2.769)
  Bottom Layer w0.3: P12.9@6.756,21.133 9.018,18.872 9.018,9.897 8.577,9.457 7.771,9.457 7.501,9.187 v1(7.501,7.569)
TV_OUT: P1.111 P12.11 | length 53.5
  Top Layer w0.152: v1(51.74,22.504) 51.74,22.41 51.943,22.207 P1.111@51.943,20.377
  Top Layer w0.5: P12.11@6.756,23.673 18.009,23.673 23.546,18.136 v1(33.731,18.136)
  Bottom Layer w0.152: v1(33.731,18.136) 34.62,17.247 46.037,17.247 46.126,17.336 46.126,19.837 48.793,22.504 v1(51.74,22.504)
VCC: C2.1 C4.1 P6.13 P6.15 P7.1 P7.2 | length 29.7
  Top Layer w0.5: C4.1@76.098,12.367 78.87,12.367 81.051,10.185 91.151,10.185 93.386,7.95 P6.13@93.624,7.95 P6.15@93.624,6.4 ; C2.1@76.378,2.715 75.895,2.232 75.895,-0.483 78.435,-0.483 78.827,-0.091 79.524,1.361 cw(c81.689,0.32) 79.908,1.932
WL_nDisable: P2.89 P10.29 | length 19
  Top Layer w0.152: v1(35.916,56.54) 36.343,56.113 P2.89@36.343,54.377
  Bottom Layer w0.152: 31.544,44.882 31.544,47.749 33.133,49.338 33.133,50.964 35.916,53.746 35.916,55.052 35.936,55.072 35.936,55.468 35.916,55.489 v1(35.916,56.54)
  Bottom Layer w0.17: 31.544,44.882 31.544,43.55 31.785,43.309 31.785,42.967 P10.29@32.614,42.139
pads on no net: P1.104 P1.106 P2.19 P2.64 P2.68 P2.70 P2.72 P2.73 P2.76 P6.NC P10.23 U1.6 U1.7 U1.9 U1.10 U2.6 U2.7 U2.9 U2.10 U3.1 U4.1

## Polygon pours and split planes (outlines as drawn)
5V on Top Layer "5V_L01_P003" (solid, pour order 3): 5.537,40.056 5.563,40.03 11.633,40.03 11.633,43.155 13.767,45.288 13.767,59.893 10.592,63.068 6.071,63.068 6.071,65.786 6.325,66.04 9.906,66.04 11.227,67.361 11.227,69.901 0.178,69.901 0.178,69.113 0.178,39.954
GND_T on Top Layer "GND_T_L01_P001" (solid, pour order 1): 91.542,10.643 91.567,10.617 91.567,2.794 78.812,2.794 77.978,3.581 74.346,3.581 74.27,3.658 74.27,-5.486 65.608,-5.486 65.608,15.24 77.216,15.24 82.067,10.389
VCC on Top Layer "VCC_L01_P000" (solid, pour order 0): 99.568,10.236 91.846,10.236 91.846,2.946 91.846,2.515 91.821,2.515 78.13,2.515 77.292,3.353 77.14,3.353 74.676,3.353 74.625,3.404 74.625,-5.486 98.603,-5.486 99.67,-5.486
GND on Bottom Layer "GND_L02_P002" (solid, pour order 2): 0.076,70.079 0.102,70.053 99.771,70.053 99.771,-5.486 0.076,-5.486

## Keep-outs
Keep-Out Layer:
  lines w0.1: 0,70.18 99.847,70.18 99.847,-5.588

## Other copper
Bottom Layer:
  text "String" at 78.842,82.772 h0.1

## Silkscreen, mask and mechanical layers (free items; w line width, h text height)
Top Overlay:
  lines w0.1: 19.143,15.836 74.177,15.836 ; 19.177,55.831 74.177,55.831 74.177,15.824
Bottom Overlay:
  text "POWER" at 4.723,54.278 h0.7 r90
  text "40" at 18.337,44.982 h0.5 r90
  text "2" at 70.36,44.401 h0.5 r270
  text "39" at 18.337,42.67 h0.5 r90
  text "1" at 70.309,41.988 h0.5 r270
  text "20" at 26.775,39.297 h0.5 r90
  text "USB" at 4.418,38.937 h0.7 r90
  text "2" at 52.986,38.787 h0.5 r270
  text "19" at 26.698,36.808 h0.5 r90
  text "1" at 52.935,36.374 h0.5 r270
  text "ETHERNET" at 86.082,-4.142 h0.7 r180

## Text inside footprints (layer, text, board x,y; h text height)
P3: Top Overlay "2" at 6.147,66.573 h0.5 r90; Top Overlay "1" at 6.172,64.237 h0.5 r90; Top Overlay "39" at 57.48,65.303 h0.5 r270; Top Overlay "40" at 57.48,67.97 h0.5 r270
P7: Top Overlay "2" at 76.911,-3.658 h0.5; Top Overlay "1" at 76.911,-1.118 h0.5; Top Overlay "4" at 70.993,-3.658 h0.5; Top Overlay "3" at 70.993,-1.118 h0.5
P8: Bottom Overlay "40" at 10.516,6.655 h0.5 r90; Bottom Overlay "39" at 10.49,4.166 h0.5 r90; Bottom Overlay "1" at 61.519,2.946 h0.5 r270; Bottom Overlay "2" at 61.544,5.41 h0.5 r270
P9: Bottom Overlay "40" at 17.297,30.886 h0.5 r90; Bottom Overlay "39" at 17.323,28.575 h0.5 r90; Bottom Overlay "1" at 68.58,26.949 h0.5 r270; Bottom Overlay "2" at 68.504,29.667 h0.5 r270
P12: Top Overlay "13" at 6.299,27.61 h0.5; Top Overlay "1" at 6.452,8.433 h0.5; Top Overlay "2" at 3.81,8.357 h0.5; Top Overlay "14" at 3.378,27.584 h0.5